# EAGLE board krokovy motor pokus (EAGLE 7.7.0)
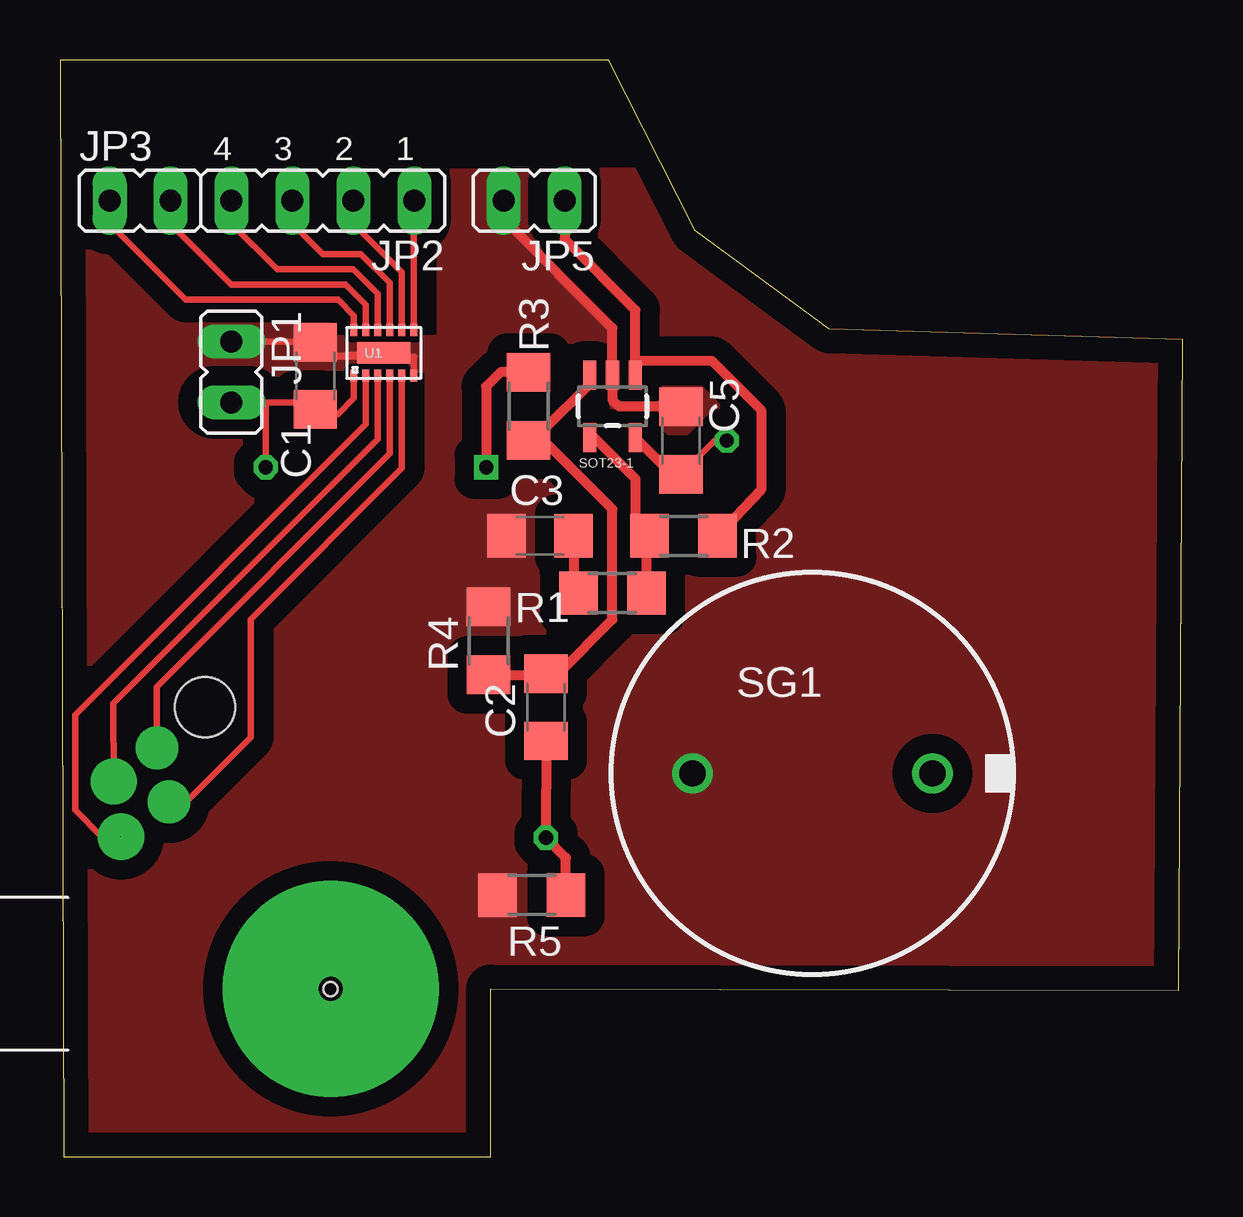
[diagram p0: board, top side]
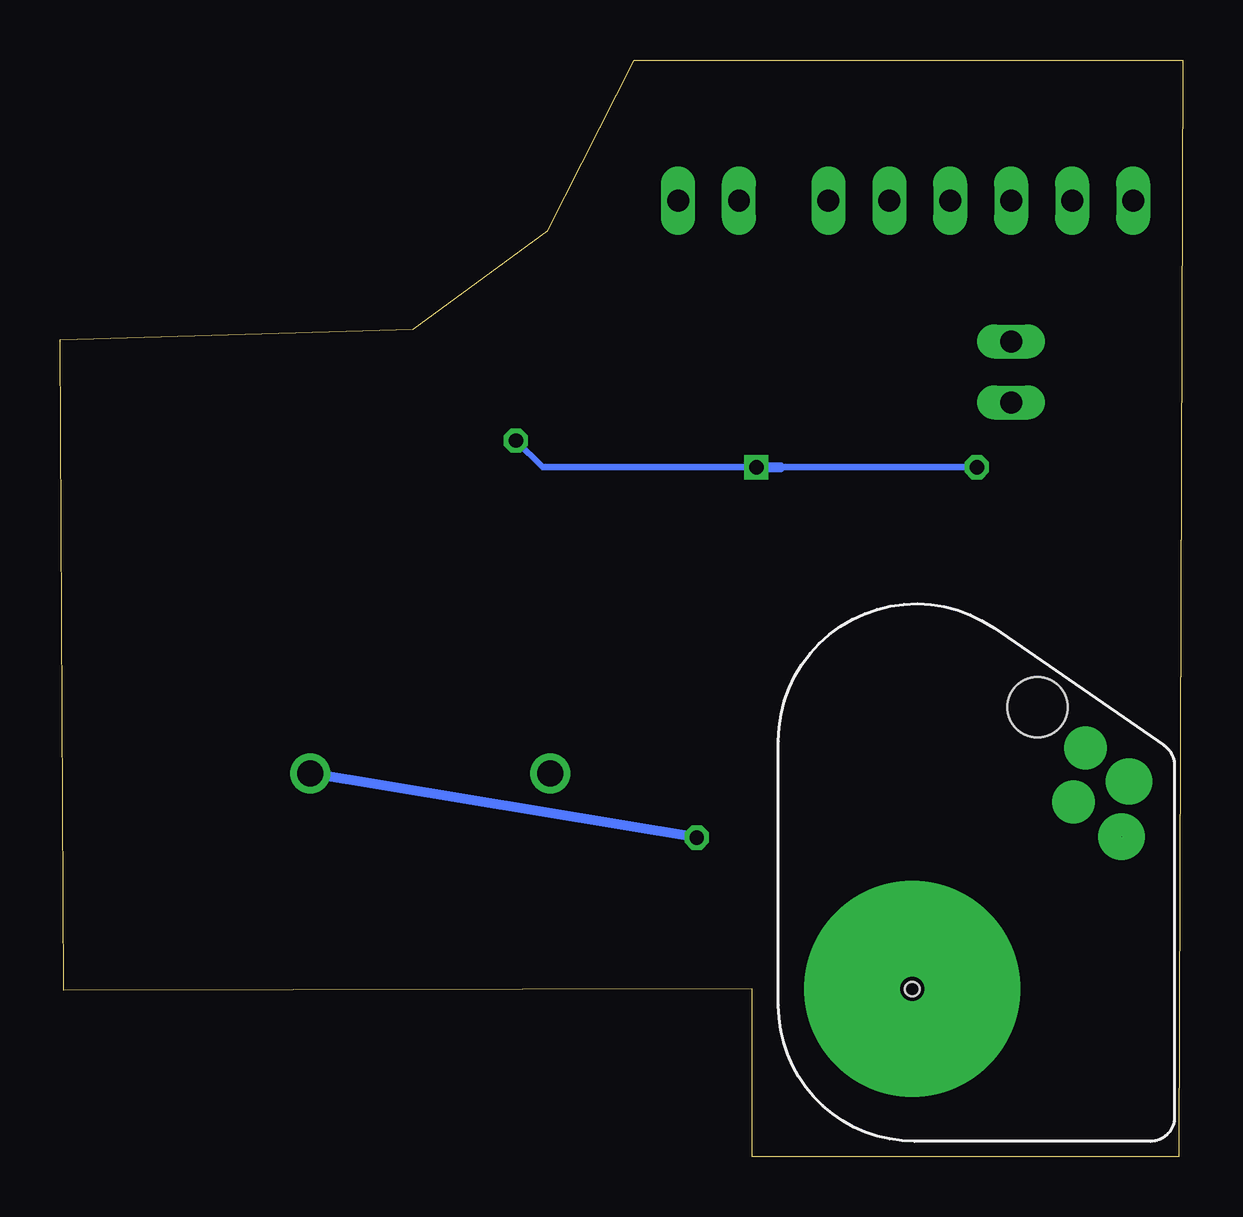
[diagram p1: board, bottom side, seen from below]

Size 46.78 x 45.71 mm. Coordinates in mm from the lower left corner, seen from the top.
Outline: 0.16,0 17.94,0 17.94,6.99 46.62,6.93 46.78,34.05 32.06,34.5 26.46,38.6 22.86,45.71 0,45.71 0.16,0
Copper layers (1*16): Top 0.035mm / dielectric 1.5mm / Bottom 0.035mm
Design rules "default": minimum track width 10mil, minimum drill 24mil, track to track 8mil, track to pad 8mil, pad to pad 8mil, via to via 8mil, smd to smd 8mil, copper to edge 40mil, drill to drill 8mil, minimum pad ring 10mil, minimum via ring 8mil, stop-mask expansion 4mil, vias tented up to drill 0mil, thermal gap 10mil

## Footprints (pad centres in the part's own frame; a part is rotated, then mirrored left to right if it is on the bottom)
C1206 = smd 1.6 x 1.8: 1 -1.4,0; 2 1.4,0
JP1 = drill 0.914 long: 1 0,-1.27; 2 0,1.27
JP4 = drill 0.914 long: 1 -3.81,0; 2 -1.27,0; 3 1.27,0; 4 3.81,0
R1206 = smd 1.6 x 1.803: 1 -1.422,0; 2 1.422,0
EFBAA40D101 = drill 1.1 pad 1.676: 1 -5,0; 2 5,0
SOT23-5 = smd 0.55 x 1.2: 1 0.32,1.24; 2 1.27,1.24; 3 2.22,1.24; 4 2.22,3.84; 5 0.32,3.84
12WSON = smd 0.28 x 0.5: 1 -1.25,-0.95; 2 -0.75,-0.95; 3 -0.25,-0.95; 4 0.25,-0.95; 5 0.75,-0.95; 6 1.25,-0.95; 7 1.25,0.95; 8 0.75,0.95; 9 0.25,0.95; 10 -0.25,0.95; 11 -0.75,0.95; 12 -1.25,0.95 | smd 2.2 x 0.9: TH 0,0
STEP_MOTOR = drill 0 pad 1.93: L1A -6.35,-8.73; L1B -8.65,-9.03 | drill 0 pad 1.778: L2A -7.8,-6.73; L2B -10.05,-7.23 | drill 1 pad 9: P$1 0,0 | drill 1 pad 2.54: P$2 -11.75,-5.23 | hole 0.6: 0,0 | hole 2.5: -11.75,-5.23

## Placement (x,y rotation side)
C1  [C1206]  10.64,32.54 90 top
C2  [C1206]  20.25,18.73 90 top
C3  [C1206]  20,25.88 0 top
C5  [C1206]  25.88,29.84 90 top
JP1  [JP1]  7.14,32.7 180 top
JP2  [JP4]  10.95,39.85 180 top
JP3  [JP1]  3.33,39.85 270 top
JP5  [JP1]  19.76,39.85 90 top
R1  [R1206]  23.02,23.5 0 top
R2  [R1206]  25.98,25.88 180 top
R3  [R1206]  19.53,31.27 270 top
R4  [R1206]  17.86,21.5 90 top
R5  [R1206]  19.66,10.9 180 top
SG1  EFBAA40D101  [EFBAA40D101]  31.35,15.97 0 top
SOT23-1  TLV271  [SOT23-5]  24.29,33.81 180 top
U1  DRV8836  [12WSON]  13.49,33.5 0 top
U$1  STEP_MOTOR  [STEP_MOTOR]  11.27,6.99 270 top

## Library data of the parts
C1-C3 C5 = eagle-ltspice; SPICEMODEL: NONE; SPICEPREFIX: C
JP1-JP3 JP5 = jumper
R1-R5 = eagle-ltspice; SPICEMODEL: NONE; SPICEPREFIX: R
SG1 = buzzer; OC_FARNELL: unknown; OC_NEWARK: unknown
SOT23-1 = texas_instruments
U1 = balto
U$1 = diplomka

## Nets
GND: C1.2 C3.1 C5.2 JP1.1 JP5.2 R4.2 R5.2 SG1.1 SOT23-1.2 U1.6 U1.TH
N$1: JP2.4 U1.10
N$2: JP2.3 U1.9
N$3: JP2.2 U1.8
N$4: JP2.1 U1.7
N$5: JP3.1 U1.12
N$6: JP3.2 U1.11
N$7: U1.2 U$1.L1A
N$8: U1.3 U$1.L1B
N$9: U1.5 U$1.L2A
N$10: U1.4 U$1.L2B
N$11: JP5.1 R2.1 SOT23-1.1
N$12: R1.2 R2.2 SOT23-1.4
N$13: C3.2 R1.1
N$14: C2.2 R3.2 R4.1 SOT23-1.3
N$16: C2.1 R5.1 SG1.2
VCC: C1.1 C5.1 JP1.2 R3.1 SOT23-1.5 U1.1

## Tracks (layer width: path | path; a pad name or v marks a point on that pad's centre or on a via)
GND
  Top 0.279: U1.TH 10.77,33.34 C1.2 10.51,33.5 | JP1.1 10,33.97 10.64,33.34 14.45,33.34 | 14.45,33.34 14.76,33.34 14.74,33.32 U1.6 | 14.45,33.34 14.29,33.5
  Top 0.406: C5.2 25.85,31.27 23.28,31.27 23.02,31.54 SOT23-1.2 23.02,34.54 18.46,39.1 18.46,39.82 JP5.2
  pour Top (isolate 0.254, no thermals): 16.67,32.76 11.11,32.86 11.11,34.13 16.67,34.13
  pour Top (isolate 0.813, rank 2, no thermals): 0.64,0.48 47.94,0.64 47.94,41.27 0.64,40.96
N$1
  Top 0.279: U1.10 13.24,35.97 12.22,36.99 9.05,36.99 7.14,38.89 JP2.4
N$2
  Top 0.279: U1.9 13.74,36.42 12.54,37.62 10.95,37.62 9.68,38.89 JP2.3
N$3
  Top 0.279: U1.8 14.24,36.87 12.22,38.89 JP2.2
N$4
  Top 0.279: U1.7 14.74,39.83 JP2.1
N$5
  Top 0.279: U1.12 12.24,35.06 11.59,35.72 5.24,35.72 2.06,38.89 JP3.1
N$6
  Top 0.279: U1.11 12.74,35.52 11.91,36.35 7.14,36.35 4.6,38.89 JP3.2
N$7
  Top 0.279: U$1.L1A 1.75,13.34 0.63,14.45 0.63,18.41 12.74,30.52 U1.2
N$8
  Top 0.279: U$1.L1B 2.23,18.9 13.24,29.91 U1.3
N$9
  Top 0.279: U1.5 14.24,28.69 7.94,22.38 7.94,17.46 5.26,14.79 U$1.L2A
N$10
  Top 0.279: U1.4 13.74,29.3 4.03,19.59 U$1.L2B
N$11
  Top 0.406: R2.1 29.21,27.79 29.21,31.11 27.15,33.18 23.97,33.18 SOT23-1.1 23.97,35.29 21.02,38.23 JP5.1
N$12
  Top 0.406: R1.2 24.44,25.86 R2.2 24.13,25.88 23.97,26.04 23.97,26.19 24.13,26.35 23.97,26.51 23.97,28.26 22.25,29.97 SOT23-1.4
N$13
  Top 0.406: C3.2 21.4,23.69 R1.1
N$14
  Top 0.406: R3.2 20.15,29.85 | 20.15,29.85 23.02,26.99 23.02,22.38 20.76,20.12 C2.2 20.21,20.08 R4.1 | 20.15,29.85 20.15,30.3 22.07,32.21 SOT23-1.3
N$16  (via drill 0.6)
  Top 0.406: C2.1 v20.24,13.29 21.08,12.46 R5.1
  Bottom 0.406: v20.24,13.29 SG1.2
VCC  (via drill 0.6)
  Top 0.279: 10.77,30.96 11.59,30.96 12.24,31.61 U1.1 | 10.77,30.96 C1.1 10.35,31.43 8.57,31.43 | JP1.2 8.57,31.43 | 10.77,30.96 10.48,30.96 10.48,30.64 | v27.78,29.84 27.28,29.84 C5.1 | v8.57,28.73 8.57,31.43
  Top 0.406: C5.1 25.5,28.45 SOT23-1.5 23.97,30.01 | R3.1 18.35,32.7 17.76,32.1 v17.76,28.73
  Top 0.61: 10.51,30.96 C1.1 10.64,30.96
  Bottom 0.279: v8.57,28.73 16.76,28.73 | v17.76,28.73 26.67,28.73 v27.78,29.84
  Bottom 0.406: v17.76,28.73 16.76,28.73